# EAGLE board avr_lag2v2 (EAGLE 5.07)
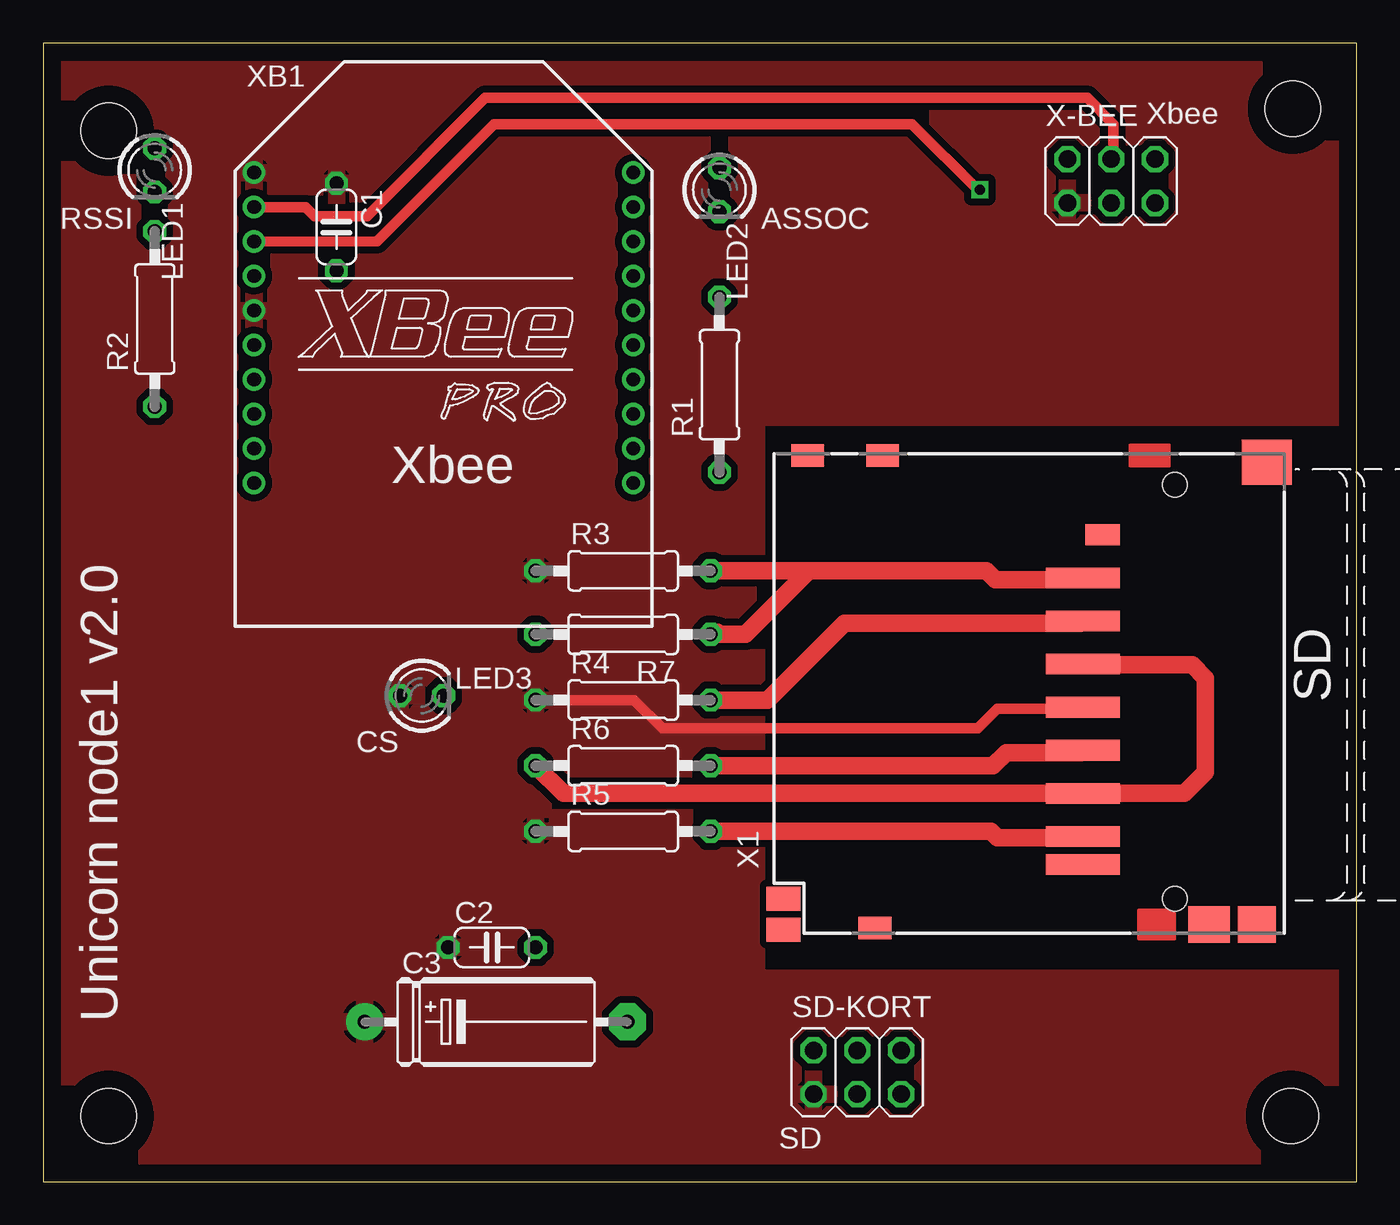
[diagram p0: board, top side]
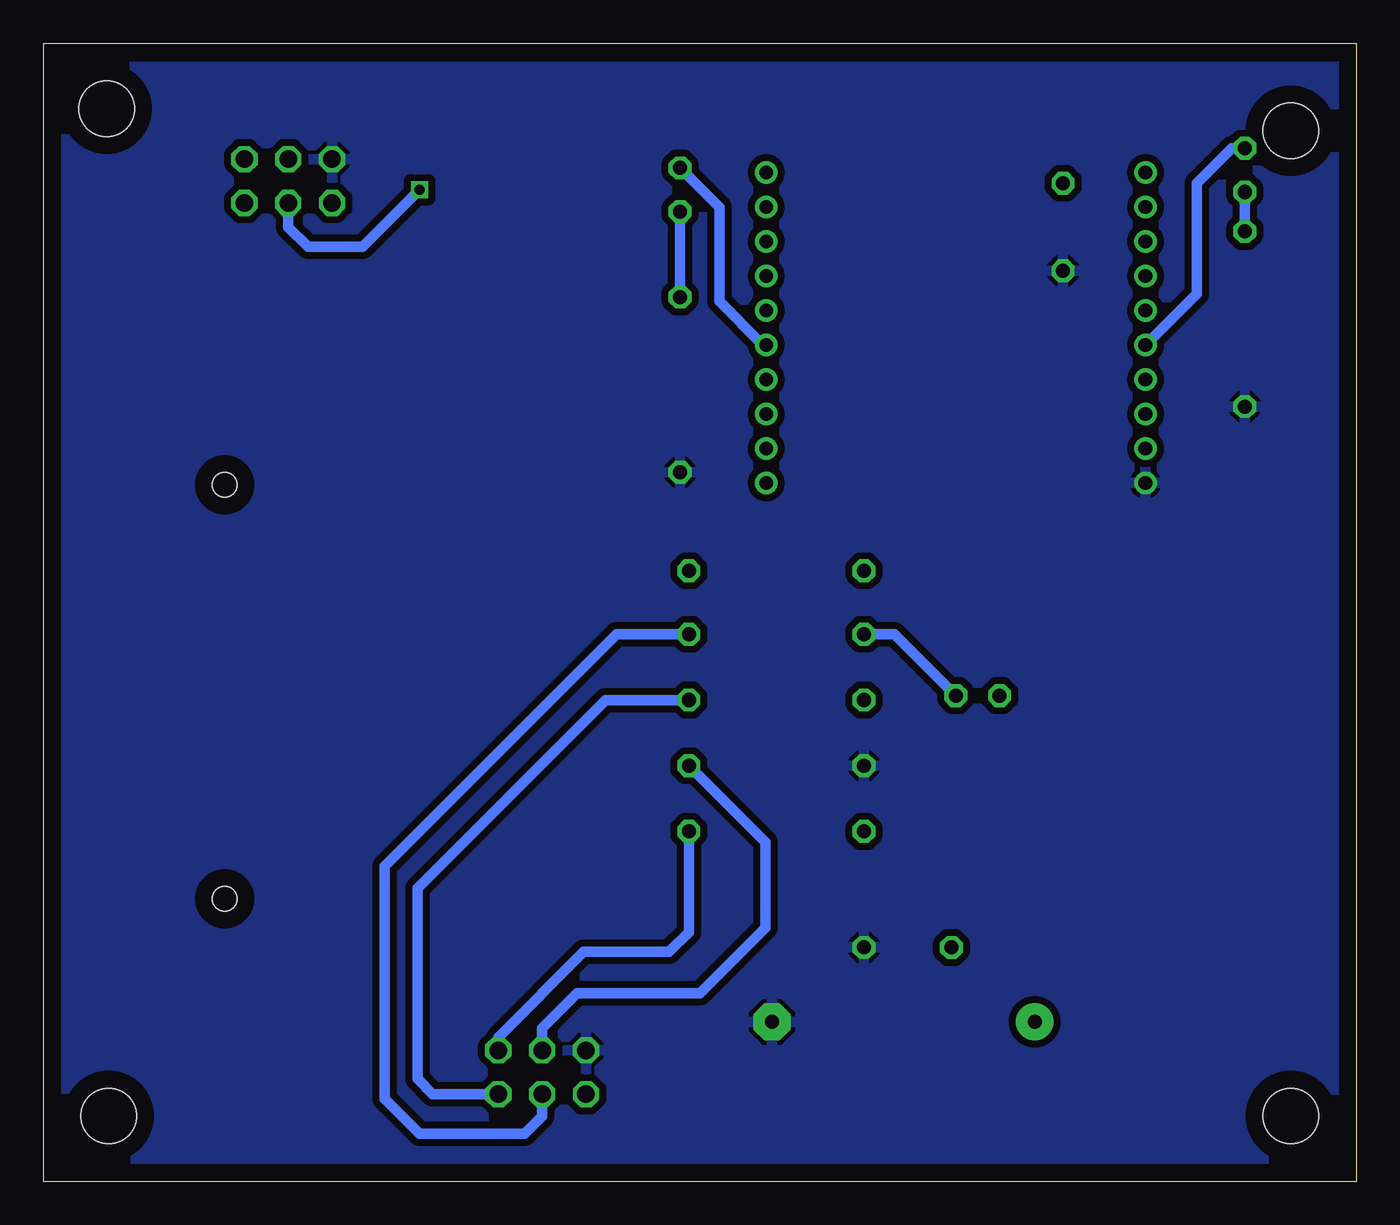
[diagram p1: board, bottom side, seen from below]

Size 76.2 x 66.04 mm. Coordinates in mm from the lower left corner, seen from the top.
Outline: 0,0 76.2,0 76.2,66.04 0,66.04 0,0
Copper layers (1*16): Top 0.035mm / dielectric 1.5mm / Bottom 0.035mm
Design rules "default *": minimum track width 10mil, minimum drill 24mil, track to track 16mil, track to pad 8mil, pad to pad 8mil, via to via 8mil, smd to smd 8mil, copper to edge 40mil, drill to drill 8mil, minimum pad ring 10mil, minimum via ring 8mil, stop-mask expansion 4mil, vias tented up to drill 0mil, thermal gap 10mil
Holes 3.2 mm at 3.81,3.81 3.81,60.96 72.52,62.23 72.39,3.81
tRestrict: area 56.5,17 to 64,39.2; area 41.9,12.3 to 75.1,43.8

## Footprints (pad centres in the part's own frame; a part is rotated, then mirrored left to right if it is on the bottom)
C050-024X044 = drill 0.813 octagon: 1 -2.54,0; 2 2.54,0
E15-5 = drill 0.813 pad 2.159 round: + -7.62,0 | drill 0.813 pad 2.159 octagon: - 7.62,0
LED3MM = drill 0.813 octagon: A -1.27,0; K 1.27,0
0207/10 = drill 0.813 octagon: 1 -5.08,0; 2 5.08,0
2X03 = drill 1.016 octagon: 1 -2.54,-1.27; 2 -2.54,1.27; 3 0,-1.27; 4 0,1.27; 5 2.54,-1.27; 6 2.54,1.27
SDBMF-009XXBXX2 = smd 1.2 x 4.3: 1 6.7,5.325; 2 4.2,5.325; 3 1.7,5.325; 4 -0.8,5.325; 5 -3.3,5.325; 6 -5.8,5.325; 7 -8.3,5.325; 8 -9.925,5.325 | smd 1.2 x 2: 9 9.2,4.175 | smd 2.1 x 2.4: M1 -13.4,-2 | smd 2.6 x 2.9: M2 13.4,-5.35 | smd 1.3 x 1.9: M3 -13.6,17.4; M4 13.8,16.95; M5 13.8,21.3 | smd 1.4 x 1.95: SW1 -11.9,22.7; SW3 -13.7,22.7 | smd 2.1 x 2.2: SW2 -13.4,-4.75 | hole 1.4: -11.9,0; 12.1,0
XBEE-PRO = drill 0.8 pad 1.27 round: 1 -11,9; 2 -11,7; 3 -11,5; 4 -11,3; 5 -11,1; 6 -11,-1; 7 -11,-3; 8 -11,-5; 9 -11,-7; 10 -11,-9; 11 11,-9; 12 11,-7; 13 11,-5; 14 11,-3; 15 11,-1; 16 11,1; 17 11,3; 18 11,5; 19 11,7; 20 11,9

## Placement (x,y rotation side)
C1  100nF  [C050-024X044]  17.02,55.37 270 top
C2  100nF  [C050-024X044]  26.04,13.59 0 top
C3  4.7uF  [E15-5]  26.29,9.27 0 top
LED1  [LED3MM]  6.48,58.67 270 top
LED2  [LED3MM]  39.24,57.53 270 top
LED3  [LED3MM]  21.97,28.19 0 top
R1  [0207/10]  39.24,46.23 90 top
R2  [0207/10]  6.48,50.04 90 top
R3  47k  [0207/10]  33.66,35.43 0 top
R4  47k  [0207/10]  33.66,27.94 0 top
R5  47k  [0207/10]  33.66,20.32 0 top
R6  47k  [0207/10]  33.66,24.13 0 top
R7  500  [0207/10]  33.66,31.75 180 top
SD-KORT  [2X03]  47.24,6.35 0 top
X1  SDBMF  [SDBMF-009XXBXX2]  65.66,28.32 90 top
X-BEE  [2X03]  61.98,58.04 0 top
XB1  XBEE-PRO  [XBEE-PRO]  23.24,49.53 0 top

## Library data of the parts
C1 C2 R1-R7 = resistor
C3 = rcl
LED1-LED3 = led
SD-KORT X-BEE = pinhead
X1 = farnell
XB1 = maxstream

## Nets
+5V: C1.1 C2.1 C3.+ LED3.A R3.1 R4.1 R5.1 SD-KORT.1 X1.4 X-BEE.1 XB1.1 XB1.5
CS: R3.2 R7.1 SD-KORT.3 X1.1
N$1: LED1.K R2.2
N$2: LED1.A XB1.6
N$5: LED2.A XB1.15
N$6: LED2.K R1.2
N$9: LED3.K R7.2
PE: C1.2 C2.2 C3.- R1.1 R2.1 R6.1 SD-KORT.2 X1.3 X1.6 X-BEE.2 XB1.10
RXD1: X-BEE.4 XB1.2
SCK: R6.2 SD-KORT.4 X1.5
SDMISO: R5.2 SD-KORT.6 X1.7
SDMOSI: R4.2 SD-KORT.5 X1.2
TXD1: X-BEE.3 XB1.3

## Tracks (layer width: path | path; a pad name or v marks a point on that pad's centre or on a via)
+5V
  Top 0.61: R4.1 34.29,27.94 35.94,26.29 54.23,26.29 55.37,27.43 60.24,27.43 X1.4
  pour Top: 1.02,64.64 75.31,64.64 75.31,0.25 1.02,0.25
CS
  Top 1.016: 44.45,35.43 R3.2 | 44.45,35.43 54.74,35.43 55.24,34.92 60.24,34.92 X1.1 | R7.1 38.99,31.75 | 38.99,31.75 39.12,31.88 | 38.99,31.75 40.77,31.75 44.45,35.43
  Bottom 0.61: SD-KORT.3 47.24,3.81 48.26,2.79 54.36,2.79 56.39,4.83 56.39,18.29 42.93,31.75 R7.1
N$1
  Bottom 0.61: R2.2 LED1.K
N$2
  Bottom 0.61: LED1.A 7.24,59.94 9.27,57.91 9.27,51.5 XB1.6
N$5
  Bottom 0.61: XB1.15 34.43,48.53 36.96,51.05 36.96,56.52 LED2.A
N$6
  Bottom 0.61: R1.2 LED2.K
N$9
  Bottom 0.61: R7.2 26.8,31.75 LED3.K
PE
  Top 1.016: X1.3 60.38,29.97 66.67,29.97 67.44,29.21 67.44,23.75 66.21,22.52 X1.6 30.18,22.52 R6.1
  pour Bottom: 0.76,64.9 75.95,64.9 75.95,55.75 75.95,0.25 0.76,0.25
RXD1
  Top 0.61: XB1.2 15.22,56.53 15.75,56.01 18.8,56.01 25.65,62.87 60.58,62.87 62.1,61.34 62.1,59.44 X-BEE.4
SCK
  Top 1.016: R6.2 55.12,24.13 55.88,24.89 60.2,24.89 X1.5
  Bottom 0.61: SD-KORT.4 47.24,8.89 45.21,10.92 38.1,10.92 34.29,14.73 34.29,19.68 R6.2
SDMISO
  Top 1.016: R5.2 54.99,20.32 55.37,19.94 60.25,19.94 X1.7
  Bottom 0.61: SD-KORT.6 49.78,8.38 44.83,13.34 39.88,13.34 38.73,14.48 R5.2
SDMOSI
  Top 1.016: R4.2 42.04,27.94 46.48,32.38 60.2,32.38 X1.2
  Bottom 0.61: SD-KORT.5 53.59,5.08 54.48,5.97 54.48,17.02 43.56,27.94 R4.2
TXD1  (via drill 0.6)
  Top 0.61: v54.36,57.53 54.23,57.53 50.42,61.34 26.16,61.34 19.37,54.55 XB1.3
  Bottom 0.61: X-BEE.3 61.98,55.37 60.83,54.23 57.66,54.23 v54.36,57.53
(copper drawn outside any net)
  shapes: Bottom circle x3, Top circle x4

## Text on the board
tPlace: Xbee | RSSI | ASSOC | Xbee | ASSOC | SD | CS | Unicorn node1 v2.0 | SD